# EAGLE board Pandora Driver- Panel machining (EAGLE 5.10)

No outline drawn. Coordinates in mm, seen from the top.
Copper layers (1+16): Top 0.035mm / dielectric 1.5mm / Bottom 0.035mm
Design rules "DRC standard check": minimum track width 7mil, minimum drill 20mil, track to track 7mil, track to pad 7mil, pad to pad 7mil, via to via 7mil, smd to smd 0mil, copper to edge 25mil, drill to drill 8mil, minimum pad ring 10mil, minimum via ring 8mil, stop-mask expansion 4mil, vias tented up to drill 0mil, thermal gap 10mil
Net classes: 0 default: width 0.178 mm, drill 0.508 mm, clearance 0.178 mm; 1 power: width 0.483 mm, drill 0.711 mm; 2 AC: width 0.381 mm, drill 0.711 mm, clearance 2.54 mm; 3 +67V: width 0.178 mm, drill 0.508 mm, clearance 0.635 mm

## Placement (x,y rotation side)
U$39  [TITLEBLOCK_PCB]  99,-8 0 top

## Library data of the parts
U$39 = QuantumOptics

## Text on the board
Document: Pandora - Machining | X.X./A.S. | B | 0.18mm | 0.5mm/0.18sp | 0.18mm | 0.1mm | 0.25mm | Rev-B1: Initial release
tDocu: (ref) | 58 | 0.5" | 40 | 4mm | 32 | 25 | 5mm | 0.5" | 0.25" | 3 places | 15.85 | 13.44 | 5mm | 11 places | 11.2 | 10.18 | 7.85 | 0 | 182 | 168 | 157 | 146 | 136 | 126 | 115 | 104 | 94 | 82 | 71 | 60 | 49 | 39 | 34.5 | 11.5 | 7 | (ref) | 58 | 47 | 0.25" | 12.83mm | 4 places | 27.85 | 11.85 | 13.44 | 0 | 164 | 144 | 132.15 | 104.85 | 70 | 0 | 194.75 | (ref)